# EAGLE board SmartMatrixSD_V2 (EAGLE 6.4)
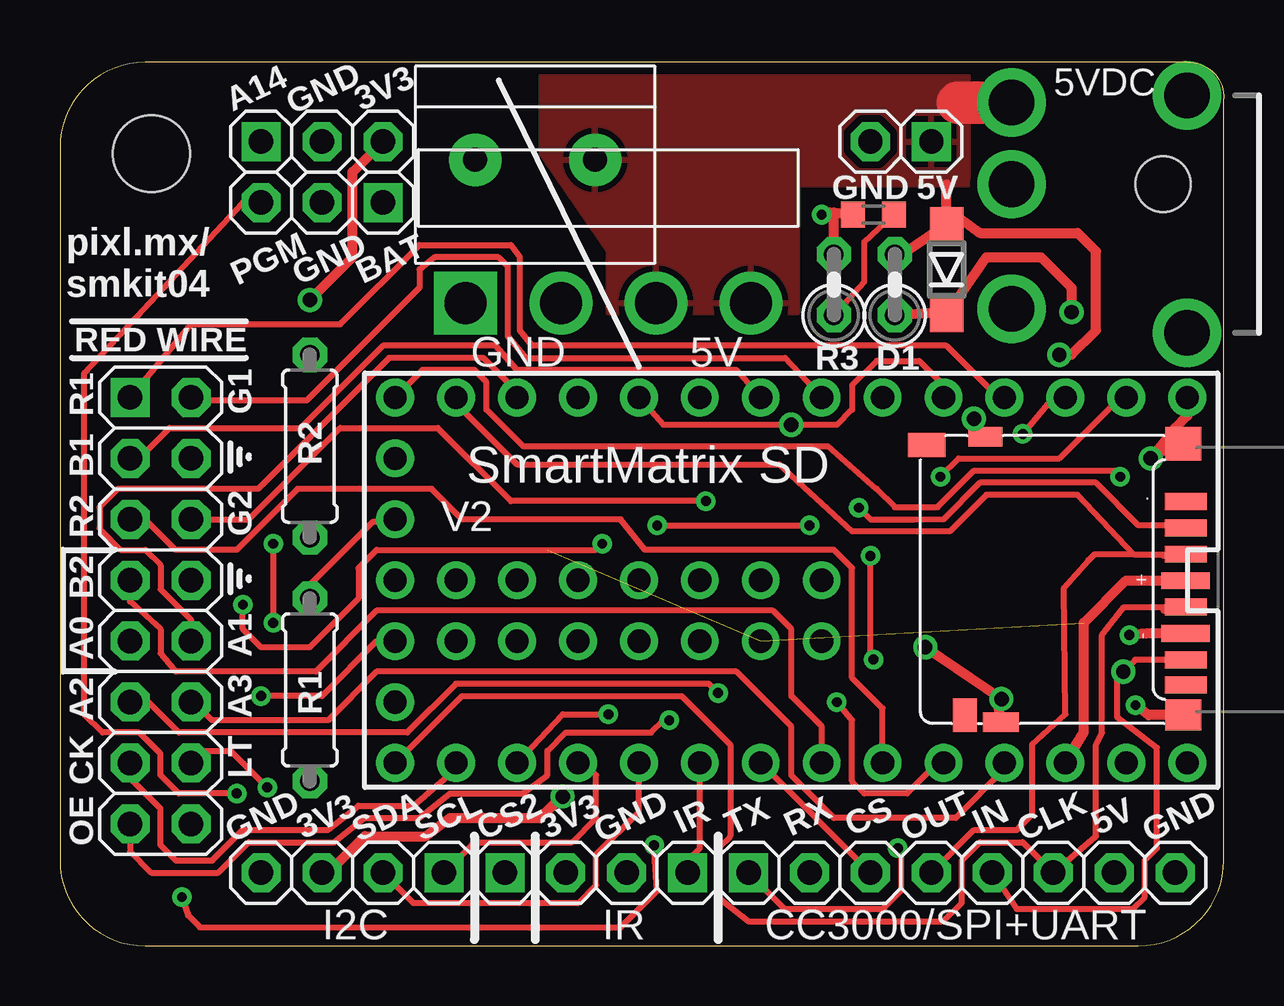
[diagram p0: board, top side]
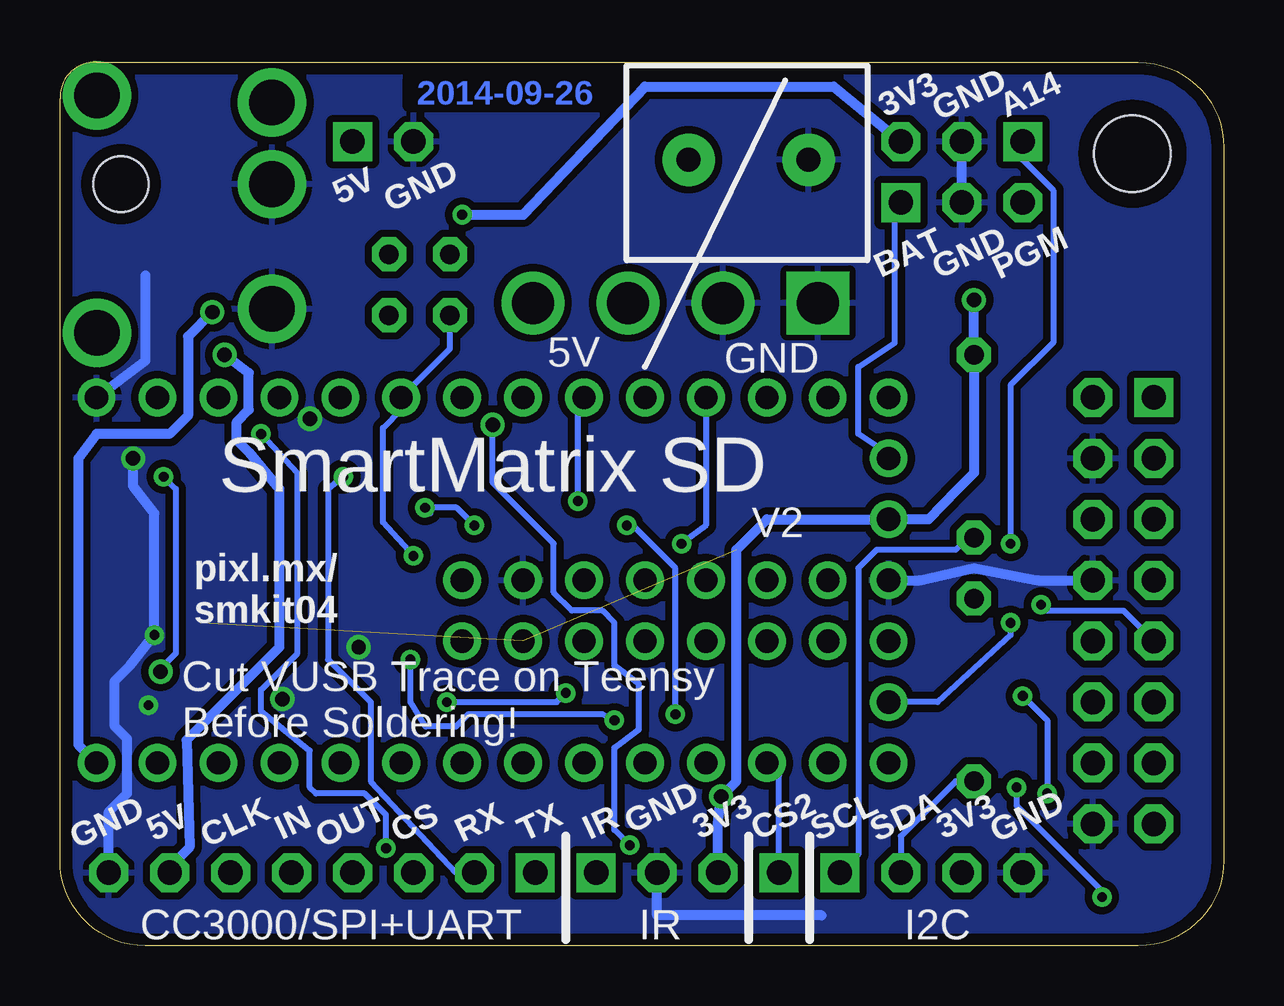
[diagram p1: board, bottom side, seen from below]

Size 48.51 x 36.83 mm. Coordinates in mm from the lower left corner, seen from the top.
Outline: 48.51,3.56 48.51,35.31 arc95 46.99,36.83 3.56,36.83 arc90 0,33.27 0,3.56 arc90 3.56,0 44.96,0 arc90 48.51,3.56
Copper layers (1*16): Top 0.035mm / dielectric 1.5mm / Bottom 0.035mm
Design rules "EagleRulesSmartProto100201 *": minimum track width 8mil, minimum drill 12mil, track to track 9mil, track to pad 9mil, pad to pad 9mil, via to via 9mil, smd to smd 0mil, copper to edge 20mil, drill to drill 10mil, minimum pad ring 12mil, minimum via ring 8mil, stop-mask expansion 2mil, vias tented up to drill 100mil, thermal gap 10mil
Net classes: 0 default: width 0.254 mm; 1 power: width 0.406 mm

## Footprints (pad centres in the part's own frame; a part is rotated, then mirrored left to right if it is on the bottom)
1X03-S = drill 1.016 square: 1 -2.54,0 | drill 1.016 octagon: 2 0,0; 3 2.54,0
1X08-S = drill 1.016 square: 1 -8.89,0 | drill 1.016 octagon: 2 -6.35,0; 3 -3.81,0; 4 -1.27,0; 5 1.27,0; 6 3.81,0; 7 6.35,0; 8 8.89,0
1X01-S = drill 1.016 square: 1 0,0
SOD123 = smd 1.4 x 1.4: A 1.9,0; C -1.9,0
0207/2V = drill 0.813 octagon: 1 -1.27,0; 2 1.27,0
1X04-S = drill 1.016 square: 1 -3.81,0 | drill 1.016 octagon: 2 -1.27,0; 3 1.27,0; 4 3.81,0
1X2-5.0MM = drill 1 pad 2.184: 1 2.5,0; 2 -2.5,0
1X04-1.56" = drill 1.75 square: 1 -5.944,0 | drill 1.75: 2 -1.981,0; 3 1.981,0; 4 5.944,0
2X08 = drill 1.016 square: 1 -8.89,-1.27 | drill 1.016 octagon: 2 -8.89,1.27; 3 -6.35,-1.27; 4 -6.35,1.27; 5 -3.81,-1.27; 6 -3.81,1.27; 7 -1.27,-1.27; 8 -1.27,1.27; 9 1.27,-1.27; 10 1.27,1.27; 11 3.81,-1.27; 12 3.81,1.27; 13 6.35,-1.27; 14 6.35,1.27; 15 8.89,-1.27; 16 8.89,1.27
STAND-OFF-3MM = hole 3.2: 0,0
DM3D = smd 0.7 x 1.75: CD/DAT3 8.15,0.45; CLK 4.85,0.45; CMD 7.05,0.45; DAT0 2.65,0.45; DAT1 1.6,0.45; DAT2 9.25,0.45 | smd 0.8 x 1.5: GND1 0.05,8.15 | smd 0.8 x 1.4: GND2 11.95,8.8 | smd 1.4 x 1.5: GND3 11.65,0.55 | smd 1.3 x 1.5: GND4 0.35,0.55 | smd 1 x 1.55: SW_A 11.6,11.25 | smd 1.4 x 1: SW_B 0.35,9.65 | smd 0.7 x 2.032: VDD 5.95,0.45; VSS 3.75,0.45
1X02-S = drill 1.016 square: 1 -1.27,0 | drill 1.016 octagon: 2 1.27,0
R0603 = smd 1 x 1.1: 1 -0.85,0; 2 0.85,0
0207/7 = drill 0.813 octagon: 1 -3.81,0; 2 3.81,0
TEENSY_3.0_ALLPINS-VUSB-A11-A10-AREF = drill 0.965: 0 -7.62,13.97; 1 -7.62,11.43; 2 -7.62,8.89; 3 -7.62,6.35; 3.3V 7.62,11.43; 3.3V1 -2.54,-16.51; 3.3V2 2.54,-1.27; 4 -7.62,3.81; 5 -7.62,1.27; 6 -7.62,-1.27; 7 -7.62,-3.81; 8 -7.62,-6.35; 9 -7.62,-8.89; 10 -7.62,-11.43; 11 -7.62,-13.97; 12 -7.62,-16.51; 13 7.62,-16.51; 14/A0 7.62,-13.97; 15/A1 7.62,-11.43; 16/A2 7.62,-8.89; 17/A3 7.62,-6.35; 18/A4 7.62,-3.81; 19/A5 7.62,-1.27; 20/A6 7.62,1.27; 21/A7 7.62,3.81; 22/A8 7.62,6.35; 23/A9 7.62,8.89; 24 0,-3.81; 25 0,-6.35; 26 0,-8.89; 27 0,-11.43; 28 0,-13.97; 29 2.54,-13.97; 30 2.54,-11.43; 31 2.54,-8.89; 32 2.54,-6.35; 33 2.54,-3.81; A12 0,1.27; A13 2.54,1.27; AGND 7.62,13.97; GND -7.62,16.51; GND1 0,-16.51; GND2 0,-1.27; PGM 2.54,-16.51; RESET 5.08,-16.51; VBAT -5.08,-16.51; VIN 7.62,16.51
PJ-051AH-SINGLEDRILLS = drill 1.9: PIN 6.3,-3.4; RING 6.3,5.2; SHIELD1 -1,6.2; SHIELD2 -1,-3.7; SWITCH 6.3,0 | hole 2.3: 0,0

## Placement (x,y rotation side)
ADC/DAC  [1X03-S]  10.92,33.53 0 top
CC3000/SPI+UART  [1X08-S]  37.59,3.05 0 top
CS2  [1X01-S]  18.54,3.05 0 top
D3  MBR0520LT  [SOD123]  36.96,28.19 90 top
D3-THT  [0207/2V]  34.8,27.56 90 top
I2C/ADC  [1X04-S]  12.19,3.05 180 top
IR  [1X03-S]  23.62,3.05 180 top
J4  1X2-5.0  [1X2-5.0MM]  19.81,32.77 180 top
JP2  [1X04-1.56"]  22.86,26.8 0 top
JP4  [2X08]  4.19,13.97 270 top
JP5  STAND-OFFSTAND-OFF-3MM  [STAND-OFF-3MM]  3.81,33.02 0 top
MICROSD  MICROSD-HRS_DM3D  [DM3D]  47.37,9.27 90 top
MISC  [1X03-S]  10.92,30.99 180 top
PWR  [1X02-S]  35.05,33.53 180 top
R1  [R0603]  33.91,30.48 180 top
R1-THT  [0207/2V]  32.26,27.56 90 top
R2  [0207/7]  10.41,10.67 90 top
R3  [0207/7]  10.41,20.83 90 top
TEENSY  TEENSY_3.0_ALL-VUSB-A10-A11-AREF  [TEENSY_3.0_ALLPINS-VUSB-A11-A10-AREF]  30.48,15.24 270 top
U$1  PJ-051AHSINGLEDRILLS  [PJ-051AH-SINGLEDRILLS]  45.97,31.75 180 top

## Library data of the parts
ADC/DAC CC3000/SPI+UART CS2 I2C/ADC IR JP4 MISC PWR = pinhead-2
D3 = diode
D3-THT R1 R1-THT R2 R3 = rcl
J4 JP2 JP5 TEENSY U$1 = eclibrary
MICROSD = hrs_DM3D-SF

## Nets
0/WIFI_RST/UART_RX: CC3000/SPI+UART.2 TEENSY.0
1/WIFI_INT_UART_TX: CC3000/SPI+UART.1 TEENSY.1
3V3 [power]: ADC/DAC.3 I2C/ADC.3 IR.3 MICROSD.VDD R1-THT.2 R1.2 R2.2 R3.2 TEENSY.3.3V TEENSY.3.3V1 TEENSY.3.3V2
11/SPI_MOSI: CC3000/SPI+UART.4 MICROSD.CMD TEENSY.11
12/SPI_MISO: CC3000/SPI+UART.5 MICROSD.DAT0 TEENSY.12
13/SPI_SCK: CC3000/SPI+UART.6 MICROSD.CLK TEENSY.13
15/SD_CS: CS2.1 MICROSD.CD/DAT3 TEENSY.15/A1
16/SCL: I2C/ADC.1 R3.1 TEENSY.16/A2
17/SDA: I2C/ADC.2 R2.1 TEENSY.17/A3
18/IR: IR.1 TEENSY.18/A4
19/WIFI_CS: CC3000/SPI+UART.3 TEENSY.19/A5
AGND: TEENSY.AGND
DAC/A14: ADC/DAC.1 TEENSY.RESET
GND [power]: ADC/DAC.2 CC3000/SPI+UART.8 I2C/ADC.4 IR.2 J4.1 JP2.1 JP2.2 JP4.4 JP4.8 JP4.16 MICROSD.GND1 MICROSD.GND2 MICROSD.GND3 MICROSD.GND4 MICROSD.VSS MISC.2 PWR.2 TEENSY.GND TEENSY.GND1 TEENSY.GND2 U$1.RING U$1.SWITCH
PANEL_ADX0: JP4.9 TEENSY.9
PANEL_ADX1: JP4.10 TEENSY.10
PANEL_ADX2: JP4.11 TEENSY.22/A8
PANEL_ADX3: JP4.12 TEENSY.23/A9
PANEL_B1: JP4.3 TEENSY.6
PANEL_B2: JP4.7 TEENSY.20/A6
PANEL_CLK: JP4.13 TEENSY.14/A0
PANEL_G1: JP4.2 TEENSY.5
PANEL_G2: JP4.6 TEENSY.7
PANEL_LATCH: JP4.14 TEENSY.3 TEENSY.8
PANEL_OE: JP4.15 R1-THT.1 R1.1 TEENSY.4
PANEL_R1: JP4.1 TEENSY.2
PANEL_R2: JP4.5 TEENSY.21/A7
PGM: MISC.3 TEENSY.PGM
VBAT: MISC.1 TEENSY.VBAT
VEXT [power]: CC3000/SPI+UART.7 D3-THT.2 D3.A J4.2 JP2.3 JP2.4 PWR.1 U$1.PIN
VIN [power]: D3-THT.1 D3.C TEENSY.VIN

## Tracks (layer width: path | path; a pad name or v marks a point on that pad's centre or on a via)
0/WIFI_RST/UART_RX  (via drill 0.41)
  Top 0.254: v36.7,19.56 37.47,20.32 41.66,20.32 43.94,22.61 44.2,22.61 TEENSY.0
  Bottom 0.254: v36.7,19.56 37.34,19.05 37.34,11.94 35.56,10.16 35.56,6.86 32,3.05 CC3000/SPI+UART.2
1/WIFI_INT_UART_TX  (via drill 0.41)
  Top 0.254: v40.13,21.34 41.4,22.86 TEENSY.1 | v34.92,4.06 35.05,3.81 35.05,2.29 34.29,1.52 30.23,1.52 CC3000/SPI+UART.1
  Bottom 0.254: v40.13,21.34 38.61,19.68 38.61,12.19 40.13,10.67 40.13,9.78 38.1,8.13 38.1,6.6 37.85,6.35 35.81,6.35 34.92,5.46 v34.92,4.06
3V3  (via drill 0.41, 0.6, 0.6 pad 0.51)  (2 unrouted)
  Top 0.254: R2.2 10.41,15.05 13.05,17.68 13.56,17.68 TEENSY.3.3V1
  Top 0.406: TEENSY.3.3V 42.67,8.89 42.67,13.46 44.43,15.22 MICROSD.VDD | v31.75,30.48 31.66,30.61 R1.2 32.26,30.57 R1-THT.2 | v10.41,26.92 12.19,28.7 12.19,32.26 ADC/DAC.3 | I2C/ADC.3 11.18,3.05 12.7,4.57 15.24,4.57 16.26,5.33 20.02,5.33 v20.95,6.22
  Bottom 0.406: IR.3 21.08,5.08 v20.95,6.22 20.32,6.86 20.32,16.51 19.05,17.78 TEENSY.3.3V1 12.31,17.78 11.12,19.01 10.41,19.72 R3.2 v10.41,26.92 | v31.75,30.48 29.21,30.48 24.13,35.81 16.26,35.81 ADC/DAC.3
11/SPI_MOSI
  Top 0.254: 45.97,16.26 MICROSD.CMD 44.77,16.32 | 44.77,16.32 42.42,18.8 38.61,18.8 37.08,17.27 33.02,17.27 29.97,20.07 19.05,20.07 16.26,22.86 TEENSY.11 | CC3000/SPI+UART.4 38.1,4.83 39.88,4.83 40.51,5.46 40.51,8.38 41.91,9.65 41.85,14.92 42.86,16.07 43.12,16.32 44.77,16.32
12/SPI_MISO  (via drill 0.41, 0.6 pad 0.41)
  Top 0.254: 47.37,11.94 47.19,11.94 46.86,11.93 | 46.86,11.93 MICROSD.DAT0 | CC3000/SPI+UART.5 39.88,1.52 44.7,1.52 45.21,2.03 45.21,3.56 45.72,4.06 45.72,8.26 44.07,9.53 44.07,11.18 v44.32,11.43 44.81,11.92 46.86,11.92 | TEENSY.12 15.11,24 17.27,24 17.78,23.5 17.78,22.35 19.3,20.83 32,20.83 34.04,19.05 34.8,18.29 36.58,18.29 38.1,19.81 43.94,19.81 v44.2,19.56 | 46.88,11.92 46.86,11.92 | 46.86,11.92 46.86,11.93
  Bottom 0.254: v44.2,19.56 43.69,19.05 43.69,12.19 44.39,11.49 v44.32,11.43
13/SPI_SCK
  Top 0.254: 46.01,13.97 MICROSD.CLK 44.35,14.12 43.43,12.95 43.43,8.89 43.18,8.38 43.18,4.57 CC3000/SPI+UART.6 40.13,4.32 38.35,4.32 37.59,3.56 37.59,1.78 36.83,1.02 28.7,1.02 27.43,2.03 27.43,4.06 27.94,4.57 27.94,8.38 25.91,10.41 16.76,10.41 TEENSY.13
15/SD_CS  (via drill 0.41)
  Top 0.254: MICROSD.CD/DAT3 46.05,17.53 44.96,17.53 43.18,19.3 38.35,19.3 36.83,17.78 35.59,17.75 33.81,17.75 v33.3,18.26 | v24.89,17.53 v31.24,17.53 | TEENSY.15/A1 20.95,9.65 v22.86,9.65
  Bottom 0.254: v22.86,9.65 22.86,15.75 24.64,17.53 v24.89,17.53 | 33.07,18.03 v33.3,18.26 31.98,18.26 v31.24,17.53 | CS2.1 18.54,7.11 TEENSY.15/A1
16/SCL
  Top 0.254: I2C/ADC.1 17.27,4.32 21.34,4.32 22.35,5.33 22.35,7.11 21.84,7.62 TEENSY.16/A2
  Bottom 0.254: R3.1 10.67,17.02 11.18,16.51 14.48,16.51 15.24,15.75 15.24,3.81 I2C/ADC.1
17/SDA
  Top 0.254: I2C/ADC.2 14.73,1.78 21.59,1.78 22.35,2.54 22.35,3.81 24.13,5.59 TEENSY.17/A3
  Bottom 0.254: R2.1 11.18,6.86 13.46,4.57 I2C/ADC.2
18/IR
  Top 0.254: IR.1 26.16,3.56 26.67,4.06 TEENSY.18/A4
19/WIFI_CS
  Top 0.254: TEENSY.19/A5 CC3000/SPI+UART.3
DAC/A14  (via drill 0.41)
  Top 0.254: v8.89,16.76 v8.89,13.46
  Bottom 0.254: ADC/DAC.1 8.38,32.77 7.11,31.5 7.11,25.15 8.89,23.37 v8.89,16.76 | v8.89,13.46 8.89,12.95 11.94,10.16 TEENSY.RESET
GND  (via drill 0.41, 0.6)
  Top 0.254: MICROSD.GND2 38.05,21.46 v38.1,21.97
  Top 0.406: MICROSD.GND3 45.84,20.57 v45.47,20.32 46.48,21.59 46.99,22.1 TEENSY.GND | MICROSD.VSS 45.27,13.02 v44.58,12.95 | MICROSD.GND1 39.12,10.06 v39.24,10.29 v36.07,12.45 | MICROSD.GND4 45.37,9.62 v44.83,10.03
  Bottom 0.406: MISC.2 ADC/DAC.2 11.18,33.78 | JP4.8 7.75,15.24 10.41,15.75 12.7,15.24 TEENSY.GND1 14.22,15.49 14.48,15.49 | 44.96,27.94 44.96,24.38 TEENSY.GND | 16.76,1.27 23.62,1.27 IR.2 | CC3000/SPI+UART.8 46.48,5.59 45.72,6.35 45.72,8.64 46.23,9.14 46.23,11.05 45.59,11.68 v44.58,12.95 44.58,18.03 45.47,19.18 v45.47,20.32
  pour Bottom (isolate 0.305): 0,36.58 0,0 48.51,0 48.51,36.58
PANEL_ADX0  (via drill 0.41)
  Top 0.254: v22.61,16.76 22.35,16.51 13.21,16.51 12.45,15.75 12.45,14.48 10.41,12.45 8.38,12.45 7.62,13.21 v7.62,14.22
  Bottom 0.254: TEENSY.9 21.59,17.53 v22.61,16.76 | v7.62,14.22 7.37,13.97 4.19,13.97 JP4.9
PANEL_ADX1
  Top 0.254: TEENSY.10 19.05,23.11 17.65,24.51 13.72,24.51 8.26,19.05 2.41,19.05 1.65,18.29 1.65,17.4 2.54,16.51 3.56,16.51 4.19,15.88 4.19,14.86 5.46,13.59 JP4.10
PANEL_ADX2  (via drill 0.41)
  Top 0.254: TEENSY.22/A8 36.58,7.62 35.31,6.35 33.53,6.35 33.02,6.86 33.02,9.4 v32.38,10.16 | JP4.11 3.68,10.16 4.95,8.89 14.48,8.89 16.51,10.92 27.05,10.92 v27.43,10.54
  Bottom 0.254: v32.38,10.16 27.81,10.16 v27.43,10.54
PANEL_ADX3
  Top 0.254: TEENSY.23/A9 39.37,7.37 37.34,5.33 32.26,5.33 30.48,7.11 30.48,9.14 28.19,11.43 13.21,11.43 11.18,9.4 6.35,9.4 5.84,9.91 5.71,9.91 JP4.12
PANEL_B1
  Top 0.254: TEENSY.6 28.19,24 19.05,24 18.16,25.02 13.46,25.02 10.03,21.59 4.57,21.59 3.3,20.32 JP4.3
PANEL_B2
  Top 0.254: TEENSY.20/A6 31.75,9.14 30.48,10.41 30.48,13.21 29.72,13.97 13.21,13.97 10.67,11.43 4.83,11.43 4.19,12.19 4.19,13.21 2.92,14.35 JP4.7
PANEL_CLK
  Top 0.254: 3.05,7.62 JP4.13 2.92,6.99 4.19,5.71 4.19,4.19 4.83,3.56 6.35,3.56 7.62,4.83 11.18,4.83 12.45,5.84 14.73,5.84 16.51,7.37 TEENSY.14/A0
PANEL_G1
  Top 0.254: TEENSY.5 30.23,24.51 19.43,24.51 18.67,25.4 18.67,28.32 18.29,28.7 15.62,28.7 14.99,28.19 14.99,27.43 10.29,22.73 5.59,22.73 JP4.2
PANEL_G2  (via drill 0.41)
  Top 0.254: v26.92,18.54 18.8,18.54 15.75,21.59 11.68,21.59 7.87,17.78 JP4.6
  Bottom 0.254: v26.92,18.54 26.92,22.61 TEENSY.7
PANEL_LATCH  (via drill 0.41, 0.6)
  Top 0.254: TEENSY.8 25.15,21.72 v30.48,21.72 32.38,21.72 33.02,22.35 33.02,23.37 34.04,24.38 35.81,24.38 36.83,23.37 TEENSY.3 | JP4.14 5.97,8.13 7.11,8.13 v8.64,6.6 | v5.08,2.03 5.33,1.27 5.84,0.76 23.37,0.76 24.89,2.29 v24.77,4.19
  Bottom 0.254: v5.08,2.03 5.08,2.29 8.64,5.84 v8.64,6.6 | v24.77,4.19 25.4,4.83 25.4,8.26 24.38,9.02 24.38,10.92 25.4,11.68 25.4,13.46 25.91,13.97 27.18,13.97 27.94,14.73 27.94,16.76 30.48,19.3 v30.48,21.72
PANEL_OE  (via drill 0.41)
  Top 0.254: JP4.15 2.92,3.94 3.81,3.05 6.6,3.05 7.87,4.32 11.43,4.32 12.7,5.33 14.99,5.33 16.26,6.35 19.3,6.35 20.32,7.11 20.32,8.13 21.08,8.89 24.64,8.89 25.15,9.4 v25.4,9.4 | R1.1 33.53,29.34 33.53,27.69 R1-THT.1 | v33.91,11.94 33.78,12.19 v33.78,16.26
  Bottom 0.254: v33.91,11.94 33.91,10.16 33.27,9.14 32,9.14 31.5,9.65 25.91,9.65 v25.4,9.4 | v33.78,16.26 35.05,17.65 35.05,21.59 34.29,22.35 TEENSY.4 32.26,24.89 R1-THT.1
PANEL_R1
  Top 0.254: TEENSY.2 38.86,23.11 36.96,25.02 19.68,25.02 19.18,25.65 19.18,28.7 18.8,29.21 14.99,29.21 11.68,25.91 5.46,25.91 JP4.1
PANEL_R2
  Top 0.254: TEENSY.21/A7 34.29,9.91 33.02,11.18 33.02,15.75 32.26,16.51 24.38,16.51 23.37,17.78 16.76,17.78 15.49,19.05 9.91,19.05 7.37,16.51 4.83,16.51 3.56,17.78 JP4.5
PGM  (via drill 0.41)
  Top 0.254: TEENSY.PGM 13.21,12.7 10.92,10.41 v8.38,10.41 | MISC.3 7.62,30.99 1.02,23.88 1.02,9.65 1.78,8.89 3.3,8.89 4.19,8 4.19,7.11 4.95,6.35 v7.37,6.35
  Bottom 0.254: v8.38,10.41 7.37,9.4 v7.37,6.35
VBAT
  Bottom 0.254: TEENSY.VBAT 13.72,20.32 15.24,21.34 15.24,24.13 13.72,25.15 13.72,30.73 MISC.1
VEXT  (via drill 0.6)
  Top 0.406: v41.66,24.64 42.16,24.64 43.18,25.65 43.18,28.96 42.42,29.72 38.35,29.72 37.47,30.35 D3.A | D3.A 36.96,31.75 | D3-THT.2 35.31,28.96 D3.A
  Top 1.778: U$1.PIN 37.44,35.15
  Bottom 0.406: v41.66,24.64 40.64,23.88 40.64,22.35 41.15,21.84 41.15,21.08 40.64,20.57 39.37,19.05 39.37,12.45 43.24,8.57 43.11,4.11 43.94,3.28 CC3000/SPI+UART.7
  pour Top (isolate 0.305): 37.85,36.58 20.07,36.58 20.07,33.02 22.86,28.96 22.86,26.42 30.73,26.42 30.73,31.75 37.85,31.75
VIN  (via drill 0.6)
  Top 0.406: v42.16,26.42 42.16,27.43 40.89,28.7 38.61,28.7 D3.C 36.57,26.42 D3-THT.1
  Bottom 0.406: v42.16,26.42 43.18,25.4 43.18,22.1 43.94,21.34 46.99,21.34 47.75,20.32 47.75,8.38 TEENSY.VIN

## Text on the board
Bottom: 2014-09-26
tPlace: A14 | GND | 3V3 | 5VDC | GND | 5V | PGM | GND | BAT | pixl.mx/ / smkit04 | RED WIRE | GND | 5V | R3 | D1 | R1 | G1 | R2 | B1 | SmartMatrix SD | R2 | G2 | V2 | B2 | A0 | A1 | R1 | A2 | A3 | CK | LT | OE | GND | 3V3 | SDA | SCL | CS2 | 3V3 | GND | IR | TX | RX | CS | OUT | IN | CLK | 5V | GND | I2C | IR | CC3000/SPI+UART
bPlace: A14 | GND | 3V3 | GND | 5V | PGM | GND | BAT | GND | 5V | SmartMatrix SD | V2 | pixl.mx/ / smkit04 | Cut VUSB Trace on Teensy / Before Soldering! | GND | 3V3 | SDA | SCL | CS2 | 3V3 | GND | IR | TX | RX | CS | OUT | IN | CLK | 5V | GND | I2C | IR | CC3000/SPI+UART
Document: SmartMatrix SD Shield | Rev V2 | Pixelmatix 2014 CC BY-SA | Note: Two 3V3 airwires are intentional, / all three points are connected together / on Teensy board